# Altium PCB motherboard_2ch_arduino.PcbDoc
Units mil, origin at the board's own origin, x right, y up, seen from the top; angles counter-clockwise.
Board outline 6102.36 x 3937.01 mil, 2 copper layers (Top Layer, Bottom Layer); 50 components, 61 nets, 260 pads, 186 vias.
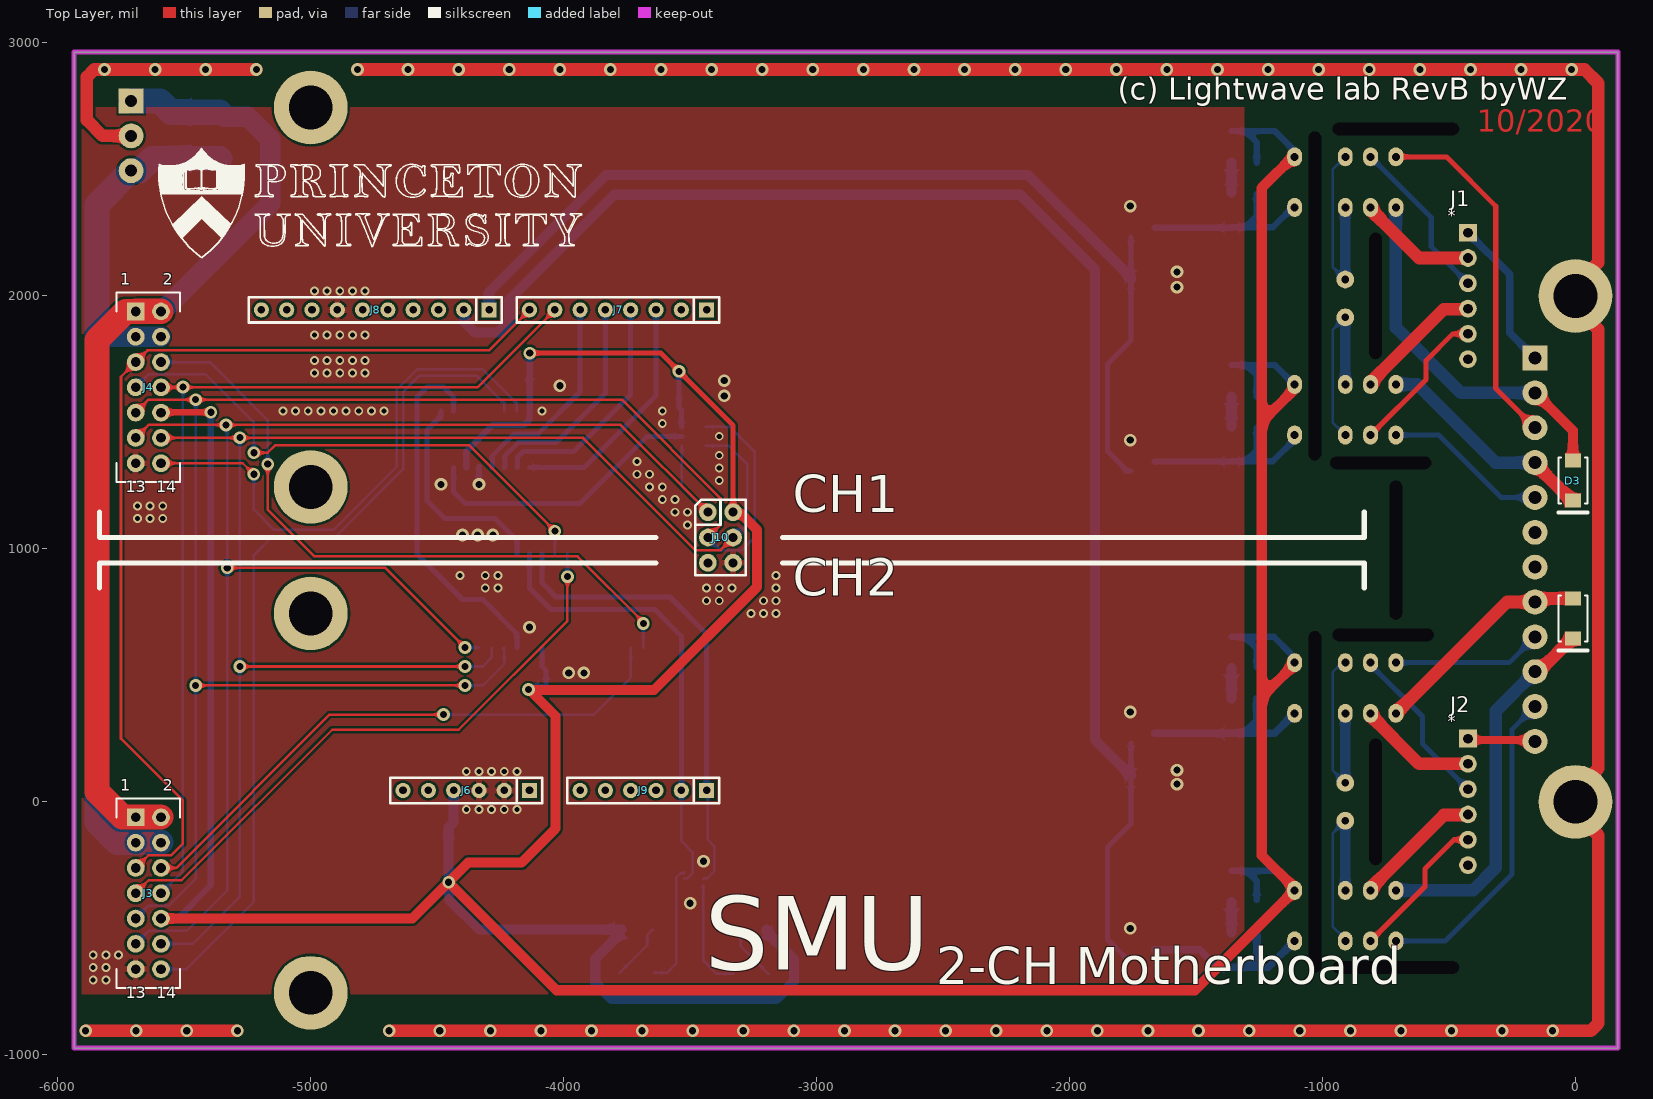
[diagram p0: Top Layer view]
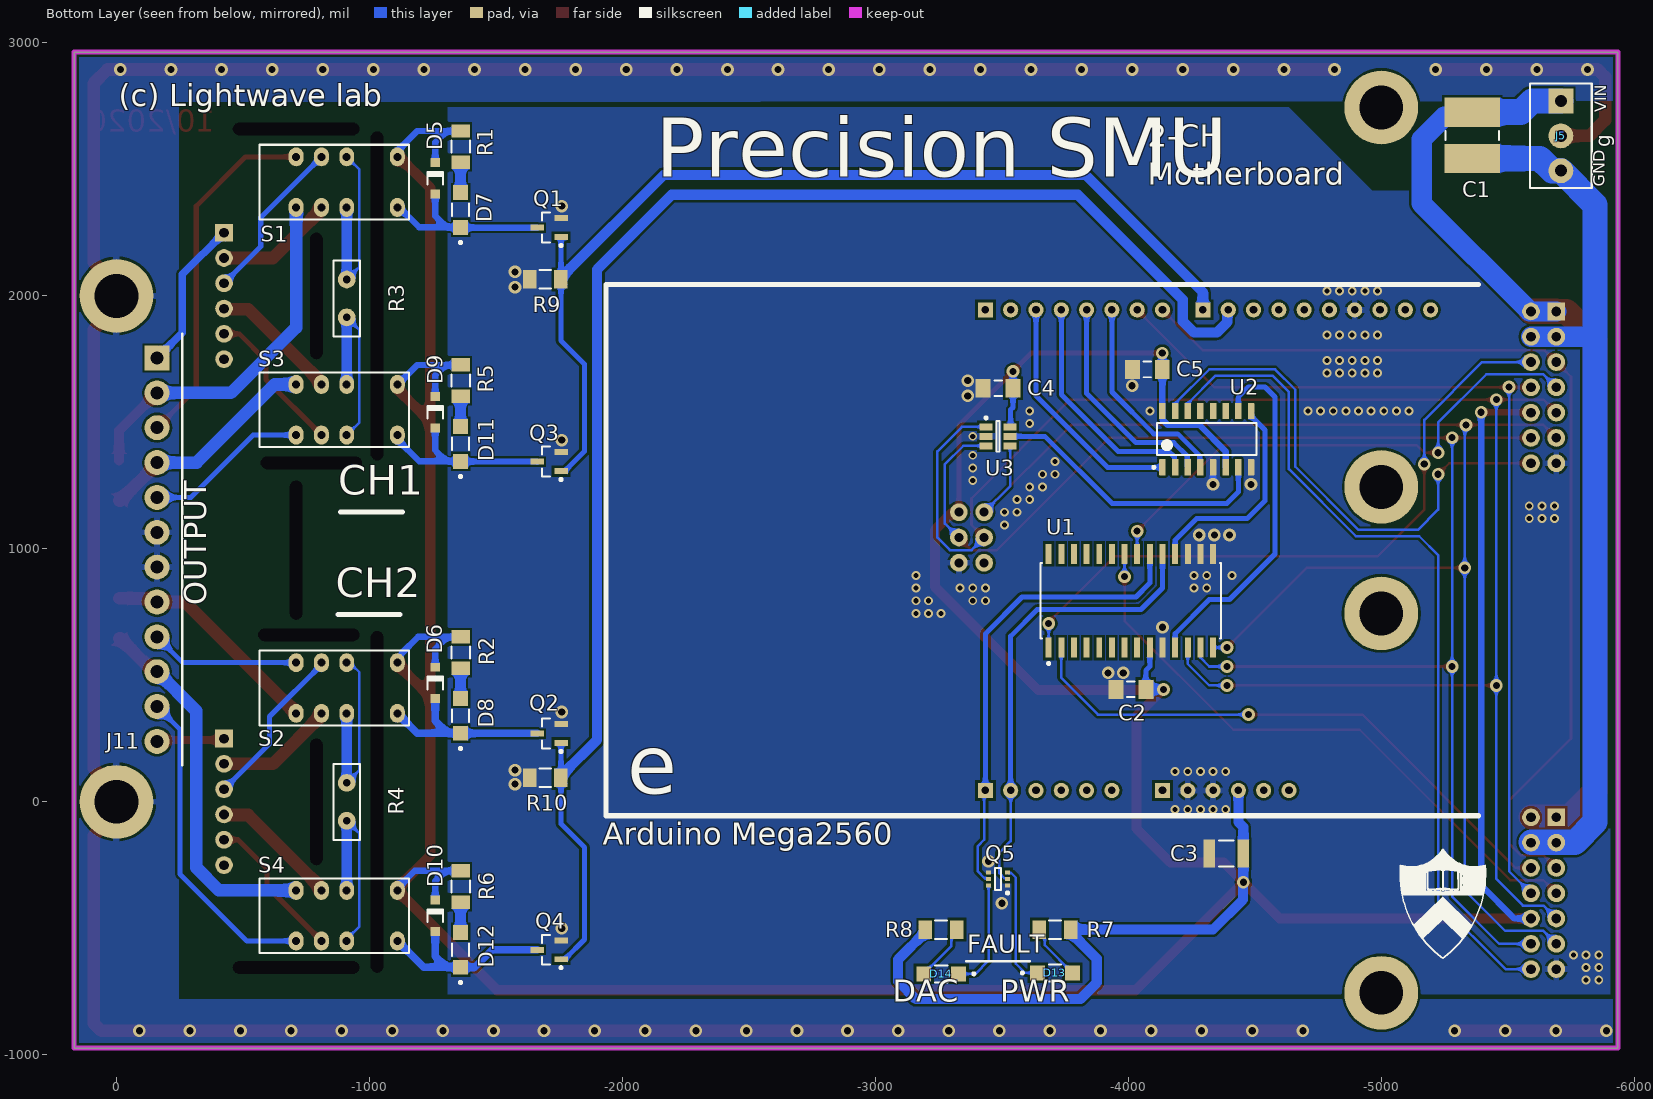
[diagram p1: Bottom Layer view, seen from below]

## Layer stack, top to bottom
Top Solder: solder mask 0.4, Solder Resist, Dk 3.5
Top Layer: signal copper 1.4
Dielectric 1: dielectric 12.6, FR-4, Dk 4.8
Bottom Layer: signal copper 1.4
Bottom Solder: solder mask 0.4, Solder Resist, Dk 3.5

## Board outline
-5935,-973.5 -5935,2963.5 167.36,2963.5 167.36,-973.5

## Design rules (kind name [scope] priority, off if disabled: settings)
BoardOutlineClearance [All] p1: gap=15 ignorepadtopadclearanceinfootprint=FALSE
Clearance [All] p1: gap=6 ignorepadtopadclearanceinfootprint=FALSE except(0: Arc-Hole Track-Hole SMDPad-Hole THPad-Hole Via-Hole Fill-Hole Poly-Hole Region-Hole Text-Hole; 10: Track-Poly SMDPad-Poly THPad-Poly THPad-Region Via-Poly Fill-Poly Poly-Poly)
ComponentClearance [All] p1: gap=1 collisioncheckmode=3 verticalgap=1 showdistances=FALSE
DiffPairsRouting [All] p1: maxlimit=393.7 minlimit=6 mostfreqgap=8 toplayer_minwidth=6 toplayer_maxwidth=15 toplayer_prefwidth=8 bottomlayer_minwidth=6 bottomlayer_maxwidth=15 bottomlayer_prefwidth=8 maxuncoupledlength=500
HoleSize [All] p1: absolutevalues=TRUE maxlimit=265 minlimit=13 maxpercent=80.000 minpercent=20.000
HoleToHoleClearance [All] p1: gap=10 allowstackedmicrovias=FALSE
MinimumAnnularRing [All] p1: minimumring=7
MinimumSolderMaskSliver [All] p1: minsoldermaskwidth=0
PlaneClearance [All] p1: clearance=10
PlaneConnect [All] p1: planeconnectstyle=Direct reliefexpansion=16 reliefentries=4 reliefconductorwidth=6 reliefairgap=6
PolygonConnect [All] p1: thpad.connectstyle=Relief thpad.reliefconductorwidth=25 thpad.reliefentries=4 thpad.polygonreliefangle="90 Angle" thpad.airgapwidth=10 smdpad.connectstyle=Direct smdpad.reliefconductorwidth=8 smdpad.reliefentries=4 smdpad.polygonreliefangle="90 Angle" smdpad.airgapwidth=6 via.connectstyle=Direct via.reliefconductorwidth=8 via.reliefentries=4 via.polygonreliefangle="90 Angle" via.airgapwidth=6
RoutingCorners [All] p1: cornerstyle=45-Degree minsetback=49.21 maxsetback=49.21
RoutingVias [All] p1: holewidth=15 width=30 viastyle="Through Hole" minholewidth=13 minwidth=27 maxholewidth=100 maxwidth=114
SilkToSilkClearance [All] p1: silktosilkclearance=0
SilkToSolderMaskClearance [IsPad] p1: minsilkscreentomaskgap=6 clearancetoexposedcopper=TRUE
SolderMaskExpansion [All] p1: expansion=2.95 istentingtop=FALSE
Width [All] p1: maxlimit=400 minlimit=6 preferedwidth=8
20 further rules are at their usual default settings.

## Components (designator, comment, footprint, x,y, rotation, side; value= is the part's Value field where it differs from the comment)
C1 "KRM55TR71H226MH01L" CAPC6050X50M -5360,2635 r90 bottom
C2 "C1206C104J3GACAUTO" FP-C1206C-EB-IPC_A -4010,445 r180 bottom value="0.10 μF"
C3 "1210YD107MAT2A" MURA-1210_H_2.7_M -4387,-205 r180 bottom
C4 "C1206C104J3GACAUTO" FP-C1206C-EB-IPC_A -3485,1635 r0 bottom value="0.10 μF"
C5 "C1206C104J3GACAUTO" FP-C1206C-EB-IPC_A -4075,1710 r180 bottom value="0.10 μF"
D3 "SMAJ33CA-TR" STM-SMA-2_V -10,1270 r270 top
D4 "SMAJ33CA-TR" STM-SMA-2_V -10,725 r270 top
D5 "1N4148W-7-F" DIOD-SOD123-2_V -1260,2465 r90 bottom
D6 "1N4148W-7-F" DIOD-SOD123-2_V -1260,470 r90 bottom
D7 "LTST-C150KGKT" FP-LTST-C150KGKT-MFG -1360,2340 r90 bottom
D8 "LTST-C150KGKT" FP-LTST-C150KGKT-MFG -1360,340 r90 bottom
D9 "1N4148W-7-F" DIOD-SOD123-2_V -1260,1540 r90 bottom
D10 "1N4148W-7-F" DIOD-SOD123-2_V -1260,-450 r90 bottom
D11 "LTST-C150KGKT" FP-LTST-C150KGKT-MFG -1360,1415 r90 bottom
D12 "LTST-C150KGKT" FP-LTST-C150KGKT-MFG -1360,-585 r90 bottom
D13 "LTST-C150KGKT" FP-LTST-C150KGKT-MFG -3710,-676 r180 bottom
D14 "LTST-C150KGKT" FP-LTST-C150KGKT-MFG -3260,-680 r0 bottom
J1 "5-146276-6" SMUIO -425,2250 r0 top locked
J2 "5-146276-6" SMUIO -425,250 r0 top locked
J3 "5-146252-7" DATAIO -5691.89,-61.42 r0 top locked
J4 "5-146252-7" DATAIO -5691.89,1938.58 r0 top locked
J5 "1984620" 1984620 -5710,2632.8 r270 bottom
J6 "POWER" "HEADER 6X1 8.5MM" -4135,45 r180 top
J7 "IOL" "HEADER 8X1 8.5MM" -3435,1945 r180 top
J8 "IOH" "HEADER 10X1 8.5MM" -4295,1945 r180 top
J9 "AD" "HEADER 6X1 8.5MM" -3435,45 r180 top
J10 "ICSP" ICSP -3430,1145 r0 top
J11 "SMU_OUTPUT" 1843897 -160,1754.57 r270 bottom
Q1 "2N7002" INF-PG-SOT23_M -1710,2270 r0 bottom
Q2 "2N7002" INF-PG-SOT23_M -1710,270 r0 bottom
Q3 "2N7002" INF-PG-SOT23_M -1710,1345 r0 bottom
Q4 "2N7002" INF-PG-SOT23_M -1710,-585 r0 bottom
Q5 "MBT3904DW1T1G" ONSC-SOT-363-6-419B-02_W_V -3485,-305 r0 bottom
R1 "RN73R2BTTD1001B25" FP-RC3216-IPC_A -1360,2590 r90 bottom
R2 "RC3216J102CS" FP-RC3216-IPC_A -1360,590 r90 bottom
R3 "Y1453500R000V9L" Y1453500R000V9L -910,1990 r90 bottom
R4 "Y1453500R000V9L" Y1453500R000V9L -910,0 r90 bottom
R5 "RC3216J102CS" FP-RC3216-IPC_A -1360,1665 r90 bottom
R6 "RC3216J102CS" FP-RC3216-IPC_A -1360,-335 r90 bottom
R7 "RC3216J102CS" FP-RC3216-IPC_A -3710,-505 r0 bottom
R8 "RC3216J102CS" FP-RC3216-IPC_A -3260,-505 r0 bottom
R9 "RN73H2BTTD1002B10" FP-RC3216-IPC_A -1695,2065 r180 bottom
R10 "RN73H2BTTD1002B10" FP-RC3216-IPC_A -1695,95 r180 bottom
S1 "G6S-2 DC5" EE2-5NU -860,2450 r0 bottom
S2 "G6S-2 DC5" EE2-5NU -860,450 r0 bottom
S3 "G6S-2 DC5" EE2-5NU -860,1550 r0 bottom
S4 "G6S-2 DC5" EE2-5NU -860,-450 r0 bottom
U1 "MCP23S17T-E/SO" FP-C04-052-MFG -4010,795 r90 bottom
U2 "CD74HC138M" D0016A_M -4310,1433.78 r90 bottom
U3 "25AA02E48T-I/OT" SOT-23-OT6_M -3485,1445 r180 bottom

## Footprints (in the part's own frame and the unit in brackets; to place one, negate y for a bottom-side part, rotate by r counter-clockwise, add the part's x,y. Pads: shape width x height; smd on the part's side, far side on the other; paste and mask are expansions set on the pad)
1843897 [mm]
  rect 2.5x2.5 hole 1.3: 1(0,0)
  round 2.5 hole 1.3: 2(3.5,0) 3(7,0) 4(10.5,0) 5(14,0) 6(17.5,0) 7(21,0) 8(24.5,0) 9(28,0) 10(31.5,0) 11(35,0) 12(38.5,0)
  silkscreen extent -2.45,2.54 40.9,2.54
1984620 [mm]
  rect 2.5x2.5 hole 1.2: 1(-3.5,0)
  round 2.5 hole 1.2: 2(0,0) 3(3.5,0)
  silkscreen extent -5.25,-3.1 5.25,3.1
CAPC6050X50M [mm] "Chip Capacitor, 2-Leads, Body 6.00x5.00mm, IPC Low Density"
  rect 2.95x5.6 smd: 1(-2.325,0) 2(2.325,0)
  silkscreen extent -0.45,-2.7 0.45,2.7, body extent -3.25,-2.75 3.25,2.75, height 5
D0016A_M [mm] "SOIC, 16-Leads, Body 10x4mm, Pitch 1.27mm, IPC Low Density"
  rrect15% 1.65x0.65 smd: 1(-2.825,4.445) 2(-2.825,3.175) 3(-2.825,1.905) 4(-2.825,0.635) 5(-2.825,-0.635) 6(-2.825,-1.905) 7(-2.825,-3.175) 8(-2.825,-4.445) 9(2.825,-4.445) 10(2.825,-3.175) 11(2.825,-1.905) 12(2.825,-0.635) 13(2.825,0.635) 14(2.825,1.905) 15(2.825,3.175) 16(2.825,4.445)
  silkscreen extent -2.95,-5 1.6,5.45, body extent -3,-4.95 3,4.95, height 1.59
DATAIO [mil]
  rect 70x70 hole 38: 1(0,0)
  round 70 hole 38: 2(100,0) 3(0,-100) 4(100,-100) 5(0,-200) 6(100,-200) 7(0,-300) 8(100,-300) 9(0,-400) 10(100,-400) 11(0,-500) 12(100,-500) 13(0,-600) 14(100,-600)
  silkscreen extent -75,-675 175,75
DIOD-SOD123-2_V [mm] "SOD123, 2-Leads, Body 2.7x1.55mm, Height 1.45mm"
  rect 0.9x0.95 smd: 1(-1.575,0) 2(1.575,0)
  silkscreen extent -0.64,-0.83 0.64,0.77, body extent -1.35,-0.77 1.35,0.77, height 1.45
EE2-5NU [mm]
  oval 1.5x1.9 hole 0.8: 1(-6.35,2.54) 3(-1.27,2.54) 4(1.27,2.54) 5(3.81,2.54) 8(3.81,-2.54) 9(1.27,-2.54) 10(-1.27,-2.54) 12(-6.35,-2.54)
  silkscreen extent -7.5,-3.75 7.5,3.75, body extent -7.5,-3.75 7.5,3.75, height 9.4
FP-C04-052-MFG [mm]
  rect 2x0.6 smd paste+0 mask+0: 1(-4.7,8.255) 2(-4.7,6.985) 3(-4.7,5.715) 4(-4.7,4.445) 5(-4.7,3.175) 6(-4.7,1.905) 7(-4.7,0.635) 8(-4.7,-0.635) 9(-4.7,-1.905) 10(-4.7,-3.175) 11(-4.7,-4.445) 12(-4.7,-5.715) 13(-4.7,-6.985) 14(-4.7,-8.255) 15(4.7,-8.255) 16(4.7,-6.985) 17(4.7,-5.715) 18(4.7,-4.445) 19(4.7,-3.175) 20(4.7,-1.905) 21(4.7,-0.635) 22(4.7,0.635) 23(4.7,1.905) 24(4.7,3.175) 25(4.7,4.445) 26(4.7,5.715) 27(4.7,6.985) 28(4.7,8.255)
  silkscreen extent -6.42,-9.05 3.8,9.05, body extent -3.8,-9.05 3.8,9.05, height 2.65
FP-C1206C-EB-IPC_A [mil]
  rect 59.24x75.05 smd paste+0 mask+0: 1(-59.09,0) 2(59.09,0)
  silkscreen extent -15,-31 15,31, body extent -63,-31 63,31, height 35
FP-LTST-C150KGKT-MFG [mm]
  rect 1.5x1.5 smd paste+0 mask+0: 1(-1.75,0) 2(1.75,0)
  silkscreen extent -3.4,-0.85 0.63,0.85, body extent -1.6,-0.8 1.6,0.8, height 1.1
FP-RC3216-IPC_A [mil]
  rect 53.34x73.16 smd paste+0 mask+0: 1(-62.03,0) 2(62.03,0)
  silkscreen extent -24,-37 24,37, body extent -63,-31 63,31, height 26
"HEADER 6X1 8.5MM" [mil] "Stackable 6 pin header"
  rect 60x60 hole 30: 1(0,0)
  round 60 hole 30: 2(100,0) 3(200,0) 4(300,0) 5(400,0) 6(500,0)
  silkscreen extent -50,-50 550,50, body extent -50,-50 550,50, height 335
"HEADER 8X1 8.5MM" [mil] "Stackable 8 pin header"
  rect 60x60 hole 30: 1(0,0)
  round 60 hole 30: 2(100,0) 3(200,0) 4(300,0) 5(400,0) 6(500,0) 7(600,0) 8(700,0)
  silkscreen extent -50,-50 750,50, body extent -50,-50 750,50, height 335
"HEADER 10X1 8.5MM" [mil] "Stackable 10 pin header"
  rect 60x60 hole 30: 1(0,0)
  round 60 hole 30: 2(100,0) 3(200,0) 4(300,0) 5(400,0) 6(500,0) 7(600,0) 8(700,0) 9(800,0) 10(900,0)
  silkscreen extent -50,-50 950,50, body extent -50,-50 950,50, height 335
ICSP [mil]
  round 70 hole 35.43: 1(0,0) 2(100,0) 3(0,-100) 4(100,-100) 5(0,-200) 6(100,-200)
  silkscreen extent -50,-250 150,50, body extent -50,-250 150,50, height 485
INF-PG-SOT23_M [mm] "SOT23, 3-Leads, Body 2.9x1.3mm, Pitch 0.95mm, IPC Low Density"
  rect 1.35x0.6 smd: 1(-1.2,0.95) 2(-1.2,-0.95) 3(1.2,0)
  silkscreen extent -1.32,-1.5 0.7,1.92, body extent -0.7,-1.5 0.7,1.5, height 1.1
MURA-1210_H_2.7_M [mm] "Chip Capacitor, 2-Leads, Body 3.5x2.7mm, IPC Low Density"
  rect 1.15x2.8 smd: 1(-1.725,0) 2(1.725,0)
  silkscreen extent -0.75,-1.3 0.75,1.3, body extent -1.75,-1.35 1.75,1.35, height 2.7
ONSC-SOT-363-6-419B-02_W_V [mm] "SOT23, 6-Leads, Body 2x1.25mm, Pitch 0.65mm"
  rect 0.5x0.4 smd: 1(-0.95,0.65) 2(-0.95,0) 3(-0.95,-0.65) 4(0.95,-0.65) 5(0.95,0) 6(0.95,0.65)
  silkscreen extent -1.07,-1.1 0.3,1.52, body extent -0.63,-1 0.63,1, height 1.1
SMUIO [mil]
  rect 70x70 hole 38: 1(0,0)
  round 70 hole 38: 2(0,-100) 3(0,-200) 4(0,-300) 5(0,-400) 6(0,-500)
SOT-23-OT6_M [mm] "SOT23, 6-Leads, Body 2.9x1.7mm, Pitch 0.95mm, Lead Span 2.8mm, IPC Low Density"
  rect 1.3x0.7 smd: 1(-1.2,0.95) 2(-1.2,0) 3(-1.2,-0.95) 4(1.2,-0.95) 5(1.2,0) 6(1.2,0.95)
  silkscreen extent -1.33,-1.55 0.15,1.97, body extent -0.9,-1.55 0.9,1.55, height 1.45
STM-SMA-2_V [mm] "Diode, 2-Leads, Body 4.6x2.9mm"
  rect 1.4x1.64 smd: 1(-2.015,0) 2(2.015,0)
  silkscreen extent -2.3,-1.45 3.21,1.45, body extent -2.3,-1.45 2.3,1.45, height 2.59
Y1453500R000V9L [mil]
  round 70 hole 30: 1(-75,0) 2(75,0)
  silkscreen extent -150,-52 150,52, body extent -150,-53 150,53, height 325

## Part data
C1: library part CAP22uF
C2 C4 C5: library part CMP-03020-020888-1, "CAP CER 0.1UF 25V C0G/NP0 1206", Capacitance="0.10 μF", Manufacturer=KEMET, Package=C1206C-EB, Temperature="-55°C to +150°C", Temperature Characteristic=C0G, Temperature Coefficient=15%, Temperature Range High=+150°C, Temperature Range Low=-55°C, Tolerance=0.05, Voltage Rating="25 V", Automotive=Yes, Automotive Grade="Grade 0", Category=Cap, ComponentLink2Description=Datasheet, ComponentLink2URL=https://content.kemet.com/datasheets/KEM_C1007_X8R_ULTRA_150C_SMD.pdf, Device Class L1="Passive Components", Device Class L2=Capacitors, Device Class L3="Ceramic Capacitors", Digikey Description="CAP CER 0.1UF 25V C0G/NP0 1206", Height=0.88mm, Ipc Land Pattern Name=CAPC320160X78, Lead Free=Yes, Manufacturer Part Number=C1206C104J3GACAUTO, Material=Ceramic, Mouser Description="Multilayer Ceramic Capacitor, AEC-Q200 MLCC Series, 0.1 - F, - 5%, C0G / NP0, 25 V", Octopart=https://octopart.com/c1206c104j3gacauto-kemet-22570084, RoHS=TRUE
C3: library part CMP-2000-06362-1, "Cap Ceramic, 47 uF, +/- 10%, -55 to 85 degC, 2-Pin SMD (1210), RoHS, Tape and Reel", Capacitance=47µF, Manufacturer=Murata, Operating Temperature=-55°C~85°C, Package / Case=1210(3225Metric), Package Description="2-Pin Surface Mount Device, Body 3.2 x 2.5 mm", Package Reference=1210, Ratings=-, Standard Package=1, Temperature Coefficient=X5R, Tolerance=±10%, Voltage - Rated=16V, Applications=GeneralPurpose, Catalog Drawings=GRMSeries_1210_2.5, Category=Capacitors, Datasheet URL=http://psearch.en.murata.com/capacitor/product/GRM32ER61C476KE15%23.pdf, Datasheet Version=04/2016, Family=CeramicCapacitors, Features=-, Height - Seated (Max)=-, Lead Spacing=-, Lead Style=-, Manufacturer URL=http://www.murata.com/, Mounting Technology=SurfaceMount, Mounting Type=SurfaceMount,MLCC, Online Catalog=GRMSeries, Other Names=490-6539-6, Packaging=Digi-Reel®, Product Training Modules=High-CapMultilayerCeramicCapacitors, Series=GRM, Size / Dimension="0.126\"Lx0.098\"W(3.20mmx2.50mm)", Thickness (Max)="0.106\"(2.70mm)", Voltage Rating DC=16V
D3 D4: library part CMP-2000-05373-2, "Transil(TM) Diode, 33 A, 36.7 V, -55 to 150 degC, 2-Pin SMA, RoHS, Tape and Reel", Breakdown Voltage Min=36.7V, Clamping Voltage Vc Max=69.7V, Diode Case Style=DO-214AC, Manufacturer=STMicroelectronics, Package Description="2-Pin Surface Mount Device, Body 4.275 x 2.575 mm", Package Reference=SMA, Peak Pulse Current Ippm="7.5 /  / A", Peak Pulse Power Dissipation=400W, Power Dissipation Pd="400 /  / W", Reverse Stand-Off Voltage Vrwm=33V, Datasheet URL=http://www.st.com/st-web-ui/static/active/en/resource/technical/document/datasheet/CD00001333.pdf, Datasheet Version="Rev. 12, 07/2010", Manufacturer URL=http://www.st.com/, No. of Pins=2Pins, Package URL=http://www.st.com/st-web-ui/static/active/en/resource/technical/document/datasheet/CD00283518.pdf, Packaging=CutTape, Product Range=SMAJSeries, SVHC=NoSVHC(17-Dec-2015), TVS Polarity=Bidirectional
D5 D6 D9 D10: library part CMP-2000-04932-2, "Fast Switching Diode, 100 V, 0.15 A, -65 to 150 degC, 2-Pin?SOD123, RoHS, Tape and Reel", If - Forward Current=0.15A, Ir - Reverse Current=1uA, Manufacturer=DiodesIncorporated, Max Surge Current=2A, Maximum Operating Temperature=+150C, Minimum Operating Temperature=-65C, Operating Temperature Range=-65Cto+150C, Package / Case=SOD-123, Package Reference=SOD123-2, Peak Reverse Voltage=100V, Vf - Forward Voltage=1.25V, Brand=DiodesIncorporated, Configuration=Single, Datasheet URL=http://www.farnell.com/datasheets/1915529.pdf, Datasheet Version="Rev. 24-2, 10/2013", Factory Pack Quantity=3000, Height=1.25mm, Length=2.85mm, Manufacturer URL=http://www.diodes.com/, Mounting Style=SMD/SMT, Package URL=http://www.diodes.com/datasheets/ds18004.pdf, Packaging=Reel, Product=SwitchingDiodes, Product Category=Diodes-GeneralPurpose,Power,Switching, Recovery Time=4ns, RoHS=True, Series=1N4148, Type=SwitchingDiode, Unit Weight=0.000353oz, Width=1.7mm
D7 D8 D11 D12 D13 D14: library part CMP-22017-000010-1, "LED GREEN CLEAR 1206 SMD", Case Code (Imperial)=1206, Case Code (Metric)=3216, Color=Green, Forward Current=30mA, Forward Voltage=2V, Lens Color=Colorless, Max Operating Temperature=85°C, Min Operating Temperature=-55°C, Package Quantity=1, Power Dissipation=75mW, Reverse Voltage=5V, Test Current=20mA, Case/Package=1206, Depth=1.6mm, Dominant Wavelength=571nm, Height=1.1mm, Illumination Color=Green, Lead Free="Lead Free", Length=3.2mm, Lens Style=Diffused, Lens Transparency=Clear, Luminous Intensity=71mcd, Mount="Surface Mount", Number of Elements=1, Number of LEDs=1, Number of Pins=2, Packaging="Tape and Reel", Power Rating=75mW, Radiation Hardening=No, Viewing Angle=130°, Wavelength=574nm, Width=1.6mm
J1 J2: library part SMUIO_RevB
J3 J4: library part DATAIO
J5: library part POWERJACK
J6: Supplier Part Number 1=2699075, Supplier 1=Arrow, Supplier 2=Arrow, Supplier 3=Newark, Supplier 4=Digi-Key, Supplier Part Number 2=2699089, Supplier Part Number 3=11P8269, Supplier Part Number 4=SAM1198-06-ND
J7: Supplier Part Number 1=2698925, Supplier 1=Arrow, Supplier 2=Arrow, Supplier 3=Digi-Key, Supplier Part Number 2=2698940, Supplier Part Number 3=SAM1198-08-ND
J8: Supplier Part Number 1=2698789, Supplier 1=Arrow, Supplier 2=Arrow, Supplier 3=Digi-Key, Supplier Part Number 2=2698803S4475693N1004, Supplier Part Number 3=SAM1198-10-ND
J9: Supplier Part Number 1=52553843, Supplier 1=Arrow, Supplier 2=Arrow, Supplier 3=Digi-Key, Supplier 4=Newark, Supplier Part Number 2=2699089, Supplier Part Number 3=SAM1198-06-ND, Supplier Part Number 4=11P8269
J10: Supplier Part Number 1=SAM1185-03-ND, Supplier 1=Digi-Key, Supplier 2=Arrow, Supplier 3=Arrow, Supplier Part Number 2=2699340, Supplier Part Number 3=46091550
Q1 Q2 Q3 Q4: library part CMP-1149-00026-1, "N-Channel OptiMOS Small-Signal-Transistor, 60 V VDS, 0.3 A ID, -55 to 150 degC, PG-SOT23, Reel, Green", Manufacturer=Infineon, ComponentLink1Description="Manufacturer URL", ComponentLink1URL=http://www.infineon.com/, ComponentLink2Description=Datasheet, ComponentLink2URL=http://www.infineon.com/dgdl/2N7002_Rev2.4.pdf?folderId=db3a3043156fd573011622e10b5c1f67&fileId=db3a304319bc939a0119c2a9461e79e6, ComponentLink3Description="Package Specification", ComponentLink3URL=http://www.infineon.com/dgdl/SOT23-Package_Overview.pdf?folderId=db3a30431936bc4b0119532290053c66&fileId=db3a30431936bc4b0119533468123c85, DatasheetVersion="Rev. 2.4", Green=TRUE, Halogen-free=TRUE, ID (max)="0.3Â A", IDpuls (max)="1.2Â A", Mounting Technology="Surface Mount", PackageDescription="3-Pin Small Outline Transistor Package, 2.9 x 1.3 mm Body, 0.95 mm Pitch", PackageReference=PG-SOT23, PackageVersion=Apr-08, Packing=Reel, PartNumber=2N7002, Ptot (max)="0.5Â W", QG="0.4Â nC", RDS (on) (max)="3,000 mOhm", RDS (on) (max) (@4.5V)="4,000 mOhm", RthJA (max)="250 K/W", VDS (max)="60 V", VGS(th) (max)="2.5Â V", VGS(th) (min)="1.5Â V"
Q5: library part CMP-1048-00877-1, "Dual General Purpose Transistors, 6-Pin SOT-363, Pb-Free, Tape and Reel", Manufacturer="On Semiconductor", ComponentLink1Description="Manufacturer URL", ComponentLink1URL=http://www.onsemi.com/, ComponentLink2Description=Datasheet, ComponentLink2URL=http://www.onsemi.com/pub_link/Collateral/MBT3904DW1T1-D.PDF, ComponentLink3Description="Package Specification", ComponentLink3URL=http://www.onsemi.com/pub_link/Collateral/NTJD4001N-D.PDF, DatasheetVersion="Rev. 9", fT Min (MHz)=300, IC Continuous (A)=0.2, Mounting Technology="Surface Mount", PackageDescription="6-Pin Small Outline Transistor, Body 2 x 1.25 mm, Pitch 0.65 mm", PackageReference=SOT-363-6-419B-02_W, PackageVersion="Rev. W, 01/2006", Packing="Tape and Reel", PartNumber=MBT3904DW1T1G, Polarity="Dual NPN", RoHS=TRUE
R1 R2 R5 R6 R7 R8: library part CMP-13261-001932-1, "Res Thick Film 1206 1kΩ 5% 0.25W ±100ppm/°C Molded SMD T/R", Case Code (Imperial)=1206, Case Code (Metric)=3216, Max Operating Temperature=155°C, Max Power Dissipation=250mW, Min Operating Temperature=-55°C, Resistance=1kR, Temperature Coefficient=100ppm/°C, Tolerance=5%, Voltage Rating (DC)=200V, Case/Package=1206, Composition="Thick Film", Contact Plating=Tin, Depth=1.6mm, Features="Moisture Resistant", Height=0.026inch, Lead Free="Lead Free", Length=0.126inch, Military Standard=Not, Number of Terminations=2, Packaging="Tape and Reel", Power Rating=250mW, Radiation Hardening=No, Width=0.063inch
R9 R10: library part CMP-13261-000768-1, "RES SMD 10K OHM 1% 1/4W 1206", Case Code (Imperial)=1206, Case Code (Metric)=3216, Max Operating Temperature=155°C, Max Power Dissipation=250mW, Min Operating Temperature=-55°C, Resistance=10kR, Temperature Coefficient=100ppm/°C, Tolerance=1%, Voltage Rating (DC)=200V, Case/Package=1206, Composition="Thick Film", Contact Plating=Tin, Depth=1.6mm, Features="Moisture Resistant", Height=0.026inch, Lead Free="Lead Free", Length=0.126inch, Military Standard=Not, Number of Terminations=2, Packaging="Tape and Reel", Radiation Hardening=No, Width=0.063inch
S1 S2 S3 S4: library part EE2-5NU
U1: library part CMP-06293-000003-1, "IC I/O EXPANDER SPI 16B 28SOIC", Case/Package=SOIC, Frequency=10MHz, Max Operating Temperature=125°C, Max Supply Voltage=5.5V, Min Operating Temperature=-40°C, Min Supply Voltage=4.5V, Nominal Supply Current=1mA, Package Quantity=1600, Power Dissipation=700mW, Interface=SPI, Lead Free="Lead Free", Max Frequency=10MHz, Mount="Surface Mount", Number of Bits=16, Number Of Channels=1, Number of I/Os=16, Number of Pins=28, Packaging="Tape and Reel", REACH SVHC="No SVHC"
U2: library part CMP-1633-00149-2, "High Speed CMOS Logic 3-to-8 Line Decoder Demultiplexer Inverting and Non-Inverting, D0016A, TUBE", F @ Nom Voltage(Max)(Mhz)=28, Generic Part Number=CD74HC138, ICC @ Nom Voltage(Max)(mA)=0.08, Manufacturer="Texas Instruments", Operating Temperature Range(C)="-55 to 125", Rating=Catalog, tpd @ Nom Voltage(Max)(ns)=30, Voltage(Nom)(V)=3.3,5, Bits(#)=8, Channels(#)=1, Code_JEDEC="MS-012 variation AC", Configuration=3：8, DatasheetVersion=SCHS147I, Function=Decoder/Demultiplexer, Input Type=LVTTL/CMOS, Output Drive (IOL/IOH)(Max)(mA)=5.2/-5.2, Output Type=CMOS, PackageReference=D0016A, Schmitt Trigger=No, Technology Family=HC, Type=Standard, VCC(Max)(V)=6, VCC(Min)(V)=2
U3: library part CMP-0165-00270-1, "2K SPI Bus Serial EEPROM with EUI-48 Node Identity, 6-Pin SOT-23, Industrial Temperature, Tape and Reel", Code_IPC=SOT26A-6, DatasheetVersion="revA, Dec-2008", PackageDescription="6-Lead Plastic Small Outline Transistor (OT) [SOT-23]", PackageReference=SOT-23-OT6, PackageVersion="revBB, Aug-2009"

## Free pads (board coordinates)
  round 291.34 hole 173.23 unplated: ""(-5000,-755) ""(-5000,745) ""(-5000,1245) ""(-5000,2745)
  round 0 hole 50 slot 1350 at 90 deg unplated: ""(-1030,0)
  round 0 hole 50 slot 1300 at 90 deg unplated: ""(-1030,2000)
  round 0 hole 50 slot 500 at 90 deg unplated: ""(-790,0) ""(-790,2000)
  round 0 hole 50 slot 400 at 0 deg unplated: ""(-770,1340) ""(-760,660)
  round 0 hole 50 slot 500 at 0 deg unplated: ""(-710,-655) ""(-710,2660)
  round 0 hole 50 slot 550 at 90 deg unplated: ""(-710,995)
  round 291.34 hole 173.23: ""(0,0) ""(0,2000)

## Via types
v1: diameter 35, hole 20, Top Layer to Bottom Layer, tented both sides, 86 vias
v2: diameter 50, hole 28, Top Layer to Bottom Layer, 57 vias
v3: diameter 50, hole 28, Top Layer to Bottom Layer, tented both sides, 43 vias

## Nets (pads, with @x,y where several pads share a name; then routed paths per layer and width w, separated by ;. In a path a pad name is that pad's centre, name@x,y a point inside that pad or via, vN(x,y) a via of type N, cw(c..) or ccw(c..) an arc to the next point about the centre after c; other vN are vias at no path point)
+5: C2.2 C3.2 C4.1 C5.2 D5.2 D6.2 D9.2 D10.2 J3.10 J4.10 J6.4 J10.2 R1.2 R2.2 R5.2 R6.2 R7.1 R8.2 S1.12 S2.12 S3.12 S4.12 U1.9 U2.6 U2.16 U3.6 | length 19704.3
  Top Layer w20: J4.10 J4.10@-5590.47,1540 ; v3(-4134,1774) -3616,1774 v3(-3544,1702) -3330,1488 J10.2
  Top Layer w25: J4.10@-5590.47,1540 v3(-5395,1540)
  Top Layer w40: J3.10 -4598.42,-461.42 -4456,-319 -4455,-319 v3(-4455,-318) ; v3(-4139,444) -4137.09,442.09 v3@-4135.09,442.09 ; J10.2 -3324.26,1139.26 -3299.26,1139.26 -3235,1075 -3235,850 -3642.91,442.09 v3@-4135.09,442.09 ; S2.12 -1110,545 -1240,415 ; S3.12@-1110,1640 -1110,1632.13 -1240,1502.13 ; S1.12@-1110,2557.13 -1240,2427.13 -1240,1502.13 ; v3(-4455,-318) -4028,-745 -1505,-745 -1121.52,-361.52 -1118.8,-361.52 -1110,-352.72 S4.12 -1110,-342.13 -1240,-212.13 -1240,415 ; v3(-4455,-318) -4377,-240 -4166,-240 -4032,-106 -4032,339 v3@-4135.09,442.09 ; -1240,415 -1240,1502.13
  Bottom Layer w20: U1.9 -4085,535 -4069,519 -4069,445.09 C2.2 ; v3(-3544,1702) -3544,1635.09 C4.1 -3544.09,1559.09 -3535,1550 -3535,1486.18 -3532.24,1483.43 U3.6
  Bottom Layer w25: J3.10 -5526.42,-461.42 -5395,-330 v3(-5395,1540) ; U2.6 -4385,1385 -4280,1490 -4155,1490 -4135,1510 U2.16 -4134.7,1545.3 -4134.7,1773.3 v3(-4134,1774) ; R6.2 -1300,-272.97 ; R2.2 -1307.03,652.03 ; R5.2 -1300,1727.03 ; R1.2 -1305,2652.03 ; D10.2 -1260,-312.97 -1300,-272.97 ; D6.2 -1260,605 -1307.03,652.03 ; D9.2 -1260,1687.03 -1300,1727.03 ; D5.2 -1260,2607.03 -1305,2652.03 ; S4.12 -1110,-342.13 -1179.16,-272.97 -1300,-272.97 ; S2.12@-1110,570 -1112.91,570 -1126.33,583.42 -1126.33,586.33 -1192.03,652.03 -1307.03,652.03 ; S3.12@-1110,1640 -1110,1647.87 -1189.16,1727.03 -1300,1727.03 ; S1.12@-1110,2565 -1110,2572.87 -1189.16,2652.03 -1305,2652.03
  Bottom Layer w40: v3(-4455,-318) -4453.09,-319.91 -4453.09,-386.91 -4335,-505 R7.1 -3778.7,-511.67 -3778.7,-523.7 -3875,-620 -3875,-715 -3810,-780 -3160,-780 -3090,-710 -3090,-622.87 -3197.97,-514.91 R8.2 ; v3@-4455,-316.55 -4455,-205.09 C3.2 ; C3.2@-4455,-202.91 -4455,-100 -4435,-80 J6.4 ; v3(-4139,444) -4139,445 C2.2
BS: J7.6 U2.4 | length 823.1
  Bottom Layer w20: U2.4 -4282.2,1325.35 -4282.2,1367.8 -4195,1455 -4100,1455 -3935,1620 J7.6
CS0: J7.3 U2.1 | length 957
  Bottom Layer w20: U2.1 -3917.44,1322.56 -3635,1605 J7.3
CS1: J7.4 U2.2 | length 926
  Bottom Layer w20: U2.2 -4182.2,1325.35 -4182.2,1362.8 -4160,1385 -3960,1385 -3735,1610 J7.4
CS2: J7.5 U2.3 | length 876
  Bottom Layer w20: U2.3 -4232.2,1325.35 -4232.2,1367.8 -4180,1420 -4030,1420 -3835,1615 J7.5
DADCS: J3.8 J4.8 J7.7 | length 3721.2
  Top Layer w10: J4.8 -4341.42,1638.58 J7.7
  Bottom Layer w10: J3.8 -5505,-274.53 v3(-5505,1640)
DCLK: J3.9 J4.9 J10.3 U1.12 U3.1 | length 6991
  Top Layer w10: J4.9 -5640.47,1590 v3(-5455,1590) -3770,1590 -3380,1200 -3380,1095 J10.3 ; v3(-5455,460) v3(-4390,460)
  Bottom Layer w10: J3.9 -5640.47,-410 -5560,-410 -5455,-305 v3(-5455,460) v3(-5455,1590) ; v3(-4390,460) -4320,460 -4235,545 -4235,599.96 -4240,604.96 U1.12 ; U3.1 -3342.4,1482.4 -3245,1385 -3245,1045 -3295,995 -3380,995 J10.3
EARTH: J5.2 J11.6 J11.7 pad.@0,0 pad.@0,2000 | length 15271.2
  Top Layer w20: v2(-5215.16,2895) v2@-5207.04,2895 ; v2@-4823.28,2895 v2(-4815.16,2895)
  Top Layer w50: v2(-5890,-905) v2(-5690,-905) v2(-5490,-905) v2(-5290,-905) ; J5.2 -5822.8,2632.8 -5885,2695 -5885,2865.71 -5855.71,2895 v2(-5815.16,2895) v2(-5615.16,2895) v2(-5415.16,2895) v2(-5215.16,2895) ; v2(-4815.16,2895) v2(-4615.16,2895) v2(-4415.16,2895) v2(-4215.16,2895) v2(-4015.16,2895) v2(-3815.16,2895) v2(-3615.16,2895) v2(-3415.16,2895) v2(-3215.16,2895) v2(-3015.16,2895) v2(-2815.16,2895) v2(-2615.16,2895) v2(-2415.16,2895) v2(-2215.16,2895) v2(-2015.16,2895) v2(-1815.16,2895) v2(-1615.16,2895) v2(-1415.16,2895) v2(-1215.16,2895) v2(-1015.16,2895) v2(-815.16,2895) v2(-615.16,2895) v2(-415.16,2895) v2(-215.16,2895) v2(-15.16,2895) 35.71,2895 90,2840.71 90,2132.24 0,2042.24 0,1957.76 90,1867.76 90,132.24 0,42.24 0,-42.24 90,-132.24 90,-875.71 60.71,-905 v2(-90,-905) v2(-290,-905) v2(-490,-905) v2(-690,-905) v2(-890,-905) v2(-1090,-905) v2(-1290,-905) v2(-1490,-905) v2(-1690,-905) v2(-1890,-905) v2(-2090,-905) v2(-2290,-905) v2(-2490,-905) v2(-2690,-905) v2(-2890,-905) v2(-3090,-905) v2(-3290,-905) v2(-3490,-905) v2(-3690,-905) v2(-3890,-905) v2(-4090,-905) v2(-4290,-905) v2(-4490,-905) v2(-4690,-905) ; J11.7 J11.7@-151.02,936.77 ; J11.6 J11.6@-157.54,1063.13
FAULT1: J4.7 U1.21 | length 2120.1
  Top Layer w10: v3(-5225,1380) -5170,1380 -5140,1410 -4375,1410 v3(-4035,1070)
  Bottom Layer w10: J4.7 -5640.47,1690 -5415,1690 -5225,1500 v3(-5225,1380) ; U1.21 v3(-4035,1070)
FAULT2: J3.7 U1.22 | length 2423.9
  Top Layer w10: J3.7 -5681.42,-361.42 -5681.42,-350.94 -5640.47,-310 -5510,-310 -4915,285 -4415,285 -3985,715 v3(-3985,890)
  Bottom Layer w10: v3(-3985,890) U1.22
FAULTINT: J9.1 Q5.5 U1.20 | length 1855.3
  Bottom Layer w10: Q5.5 -3444.72,-302.13 -3432.13,-302.13 -3405,-275 -3405,-175 -3430,-150 J9.1@-3430,40
  Bottom Layer w20: U1.20 -4085,865 -4030,810 -3580,810 -3435,665 J9.1 J9.1@-3430,40
GND: C2.1 C3.1 C4.2 C5.1 J3.13 J4.13 J6.2 J6.3 J8.7 J10.6 Q1.2 Q2.2 Q3.2 Q4.2 Q5.1 Q5.4 R9.1 R10.1 U1.10 U1.15 U1.16 U1.17 U2.5 U2.8 U3.2 | length 67.6
  Bottom Layer w25: v3(-4335,1255) U2.5
  other v1: -5860,-705 -5810,-705 -5860,-655 -5810,-655 -5860,-605 -5810,-605 -5760,-605 -4385,-30 -4335,-30 -4285,-30 -4235,-30 -4185,-30 -4385,120 -4335,120 -4285,120 -4235,120 -4185,120 -3260,745 -3210,745 -3160,745 -3435,795 -3385,795 -3210,795 -3160,795 -4310,845 -4260,845 -3435,845 -3385,845 -3335,845 -3160,845 -4410,895 -4310,895 -4260,895 -3160,895 -3510,1095 -5685,1120 -5635,1120 -5585,1120 -3560,1145 -3510,1145 -5685,1170 -5635,1170 -5585,1170 -3610,1195 -3560,1195 -3660,1245 -3610,1245 -3385,1270 -3710,1295 -3660,1295 -3385,1320 -3710,1345 -3385,1370 -3385,1445 -3610,1495 -5110,1545 -5060,1545 -5010,1545 -4960,1545 -4910,1545 -4860,1545 -4810,1545 -4760,1545 -4710,1545 -4085,1545 -3610,1545 -4985,1695 -4935,1695 -4885,1695 -4835,1695 -4785,1695 -4985,1745 -4935,1745 -4885,1745 -4835,1745 -4785,1745 -4985,1845 -4935,1845 -4885,1845 -4835,1845 -4785,1845 -4985,2020 -4935,2020 -4885,2020 -4835,2020 -4785,2020
  other v3: -1760,-500 -3500,-401 -3447,-235 -1575,70 -1575,125 -1760,355 -3980,510 -3920,510 -4135,690 -4400,1055 -4340,1055 -4280,1055 -4485,1255 -1760,1430 -3365,1605 -4015,1645 -3365,1665 -1575,2035 -1575,2095 -1760,2355
Guard_CH1: J1.1 J11.1 | length 605.2
  Bottom Layer w30: J1.1 -260,2085 -260,1854.57 J11.1
Guard_CH2: J2.1 J11.12 | length 269.6
  Top Layer w30: J2.1 -419.41,244.41 -165.59,244.41 J11.12
Hi_CH1: D3.1 J11.2 S1.5 | length 1464.8
  Top Layer w40: J11.2@-156.77,1616.77 J11.2 -10,1466.77 D3.1
  Bottom Layer w50: S1.5 -710,1875 -451.77,1616.77 J11.2
Hi_CH2: D4.1 J11.8 S2.5 | length 889.8
  Top Layer w50: S2.5 -710,352.72 -701.2,361.52 -698.48,361.52 -270,790 J11.8 -146.9,790 -132.57,804.33 D4.1
LDAC: J3.5 J4.5 J7.8 | length 3899.3
  Top Layer w10: J3.5 -5642.27,-211.8 -5551.8,-211.8 -5505,-165 -5505,5 -5750,250 -5750,1680.47 -5693.58,1736.89 -5691.89,1736.89 J4.5 -5645.47,1785 -4295,1785 J7.8
Lo_CH1: D3.2 J11.4 S3.8 | length 893.3
  Top Layer w50: J11.4 -160,1335.94 -14.72,1190.67 D3.2
  Bottom Layer w50: S3.8 -625,1650 -316.18,1341.18 J11.4
Lo_CH2: D4.2 J11.10 S4.8 | length 1475.3
  Top Layer w50: J11.10 -150.73,523.68 -136.72,523.68 -14.72,645.67 D4.2
  Bottom Layer w50: S4.8 -405,-350 -315,-260 -315,359.41 J11.10
MemCS: U2.7 U3.5 | length 1128.7
  Bottom Layer w20: U2.7 -4435,1225 -4390,1180 -3935,1180 -3670,1445 U3.5
MISO: J3.11 J4.11 J10.1 U1.14 U3.4 | length 6173.3
  Top Layer w10: J4.11 -5681.42,1438.58 -5681.42,1449.06 -5640.47,1490 v3(-5335,1490) -3775,1490 J10.1 ; v3(-5330,925) -4705,925 v3(-4390,610)
  Bottom Layer w10: J4.11@-5701.42,1429.06 -5701.42,1438.58 J4.11 ; J3.11 -5640.47,-510 -5490,-510 -5330,-350 v3(-5330,925) -5330,1485 v3(-5335,1490) ; v3(-4390,610) U1.14 U1.14 ; U3.4 -3532.24,1247.24 J10.1
MONCS: U1.11 U2.10 | length 1433.7
  Bottom Layer w20: U2.10 -4435,1600 -4475,1640 -4540,1640 -4580,1600 -4580,980 -4400,800 -4320,800 -4185,665 U1.11
MONRST: U1.18 U2.9 | length 851.9
  Bottom Layer w20: U2.9 -4485,1525.32 -4540,1470.32 -4540,1190 -4470,1120 -4270,1120 -4185,1035 U1.18
MOSI: J3.12 J4.12 J10.4 U1.13 U3.3 | length 6225.5
  Top Layer w10: J4.12 -3923.58,1438.58 -3480,995 -3380,995 J10.4 ; v3(-5280,535) v3(-4390,535)
  Bottom Layer w10: J3.12 -5466.42,-561.42 -5280,-375 v3(-5280,535) v3(-5280,1440) ; v3(-4390,535) -4320,535 -4285,570 U1.13 ; U3.3 -3347.6,1407.6 -3275,1335 -3275,1100 J10.4
NetD5_1: D5.1 D7.1 Q1.3 S1.1 | length 747.2
  Bottom Layer w25: Q1.3 -1361.1,2270 D7.1 -1305,2271.1 ; D5.1 -1260,2316.1 -1305,2271.1 ; S1.1@-1110,2365 -1110,2357.13 -1196.02,2271.1 -1305,2271.1
NetD6_1: D6.1 D8.1 Q2.3 S2.1 | length 743.5
  Bottom Layer w20: Q2.3 Q2.3@-1662.2,270.55 ; D8.1@-1360.55,270.55 D8.1
  Bottom Layer w30: Q2.3@-1662.2,270.55 D8.1@-1360.55,270.55 ; D8.1 -1310,271.1 ; D6.1 -1260,321.1 -1310,271.1 ; S2.1 -1132.39,327.6 -1188.9,271.1 -1310,271.1
NetD7_2: D7.2 R1.1 | length 119.1
  Bottom Layer w40: D7.2 R1.1
NetD8_2: D8.2 R2.1 | length 119.1
  Bottom Layer w40: D8.2 R2.1
NetD9_1: D9.1 D11.1 Q3.3 S3.1 | length 746.7
  Bottom Layer w25: Q3.3 -1662.2,1345.55 -1360.55,1345.55 D11.1 -1303.9,1346.1 ; D9.1 -1260,1390 -1303.9,1346.1 ; S3.1@-1110,1440 -1110,1432.2 -1196.1,1346.1 -1303.9,1346.1
NetD10_1: D10.1 D12.1 Q4.3 S4.1 | length 784.4
  Bottom Layer w30: Q4.3 -1485,-585 -1416.1,-653.9 D12.1 -1303.9,-653.9 ; D10.1 -1260,-610 -1303.9,-653.9 ; S4.1@-1123.43,-563.43 -1213.9,-653.9 -1303.9,-653.9 ; S4.1@-1123.42,-563.43 S4.1
NetD11_2: D11.2 R5.1 | length 119.1
  Bottom Layer w40: D11.2 R5.1
NetD12_2: D12.2 R6.1 | length 119.1
  Bottom Layer w40: D12.2 R6.1
NetD13_1: D13.1 Q5.3 | length 482.1
  Bottom Layer w10: D13.1 -3591,-676 -3555,-640 -3555,-300 -3537.28,-282.28 -3525.28,-282.28 Q5.3
NetD13_2: D13.2 R7.2 | length 225.2
  Bottom Layer w10: D13.2 -3669.64,-566.74 -3669.64,-526.67 R7.2
NetD14_1: D14.1 Q5.6 | length 440.4
  Bottom Layer w10: Q5.6 -3450,-332.99 -3448.07,-332.99 -3447.6,-333.46 -3447.6,-627.4 -3395,-680 D14.1
NetD14_2: D14.2 R8.1 | length 230.3
  Bottom Layer w10: R8.1 -3300.36,-526.67 -3300.36,-569.64 -3215.63,-654.37 -3215.63,-655.47 D14.2 D14.2@-3190,-680
NetJ1_2: J1.2 S1.4 | length 480.3
  Top Layer w50: S1.4 -810,2342.13 -617.87,2150 J1.2
  Bottom Layer w40: S1.4@-810,2342.13 S1.4
NetJ1_3: J1.3 S1.9 | length 659.5
  Bottom Layer w20: S1.9 -570,2310 -570,2195 J1.3
NetJ1_4: J1.4 S3.9 | length 513.9
  Top Layer w50: S3.9 -810,1657.87 -520,1947.87 -427.13,1947.87 J1.4
NetJ1_5: J1.5 S3.4 | length 594.6
  Top Layer w20: S3.4 -590,1670 -590,1745 -485,1850 J1.5
NetJ2_2: J2.2 S2.4 | length 472.5
  Top Layer w50: S2.4 -810,342.13 -617.87,150 J2.2
NetJ2_3: J2.3 S2.9 | length 659.5
  Bottom Layer w20: S2.9 -810,542.13 -605,337.13 -605,230 J2.3
NetJ2_4: J2.4 S4.9 | length 513.9
  Top Layer w50: S4.9 -810,-342.13 -520,-52.13 -427.13,-52.13 J2.4
NetJ2_5: J2.5 S4.4 | length 591.7
  Top Layer w20: S4.4 -595,-335 -595,-265 -480,-150 J2.5
NetR3_1: R3.1 S3.3 S3.10 | length 771.4
  Bottom Layer w10: S3.3 -960,1500 -960,1865 R3.1
  Bottom Layer w40: S3.10 R3.1
NetR3_2: R3.2 S1.3 S1.10 | length 811.4
  Bottom Layer w10: R3.2 -960,2115 -960,2500 S1.10
  Bottom Layer w40: R3.2 S1.3
NetR4_1: R4.1 S4.3 S4.10 | length 791.4
  Bottom Layer w10: S4.3 -910,-542.13 -960,-492.13 -960,-125 R4.1
  Bottom Layer w40: S4.10 R4.1
NetR4_2: R4.2 S2.3 S2.10 | length 814.4
  Bottom Layer w10: R4.2@-915,75 -915,80 -960,125 -960,512.13 -910,562.13 S2.10@-910,570
  Bottom Layer w40: R4.2@-915,75 R4.2 S2.3
PGND: C1.1 J3.3 J3.4 J4.3 J4.4 J5.3 | length 3539.5
  Bottom Layer w80: -5845,1840 -5843.58,1838.58 J4.3 J4.4
  Bottom Layer w100: J3.4@-5593.31,-160 -5765,-160 -5845,-80 -5845,1840 -5845,2360 J5.3 -5675,2495 -5626.54,2543.46 C1.1
PGOOD1: J4.6 U1.1 | length 2644.5
  Top Layer w10: v3(-5170,1335) -5170,1155 -4985,970 -3945,970 -3685,710 v3(-3685,705)
  Bottom Layer w10: J4.6 -5591.89,1736.89 -5588.78,1740 -5587.36,1738.58 -5398.58,1738.58 -5170,1510 v3(-5170,1335) ; U1.1 v3(-3685,705)
PGOOD2: J3.6 U1.2 | length 2288.1
  Top Layer w10: J3.6 -5531.42,-261.42 -4925,345 v3(-4475,345)
  Bottom Layer w10: v3(-4475,345) -3880,345 -3735,490 U1.2
POWERINT: J9.2 Q5.2 U1.19 | length 1811.3
  Bottom Layer w10: J9.2 -3535,-155 -3490,-200 -3490,-282 -3510.13,-302.13 -3519.53,-302.13 Q5.2
  Bottom Layer w20: U1.19 -4135,845 -4050,760 -3640,760 -3535,655 J9.2
RL_CH1: J8.1 Q1.1 Q3.1 R9.2 | length 3976.7
  Bottom Layer w20: Q3.1 -1772.01,1307.6 -1850,1385.59 -1850,1730 -1757.03,1822.97 R9.2 ; R9.2@-1757.14,2075.01 Q1.1@-1757.14,2232.49
  Bottom Layer w30: R9.2@-1757.14,2065.11 R9.2
  Bottom Layer w40: J8.1 -4295,2015 -3832.4,2477.6 -2162.6,2477.6 -1766.58,2081.58 -1763.7,2081.58 -1757.14,2075.01 R9.2@-1757.14,2065.11
RL_CH2: J8.2 Q2.1 Q4.1 R10.2 | length 5957.9
  Bottom Layer w20: Q4.1 -1772.01,-622.4 -1773.82,-620.59 -1850,-544.41 -1850,-180 -1757.03,-87.03 R10.2 -1757.14,95.11 -1757.14,105.01 -1757.14,232.49 Q2.1
  Bottom Layer w40: J8.2 -4391.17,1941.17 -4391.17,1896.17 -4350,1855 -4260,1855 -4215,1900 -4215,1985 -3800,2400 -2195,2400 -1900,2105 -1900,245 -1766.58,111.58 -1763.7,111.58 R10.2@-1757.14,105.01
SHi_CH1: J11.3 S1.8 | length 1423.9
  Top Layer w20: S1.8 -510,2550 -315,2355 -315,1633.98 J11.3
  Bottom Layer w20: S1.8@-710,2542.13 S1.8
SHi_CH2: J11.9 S2.8 | length 592.3
  Bottom Layer w20: S2.8 -262.2,550 J11.9
SLo_CH1: J11.5 S3.5 | length 652.2
  Bottom Layer w20: S3.5 -540,1450 -293.39,1203.39 J11.5
SLo_CH2: J11.11 S4.5 | length 1268.7
  Bottom Layer w20: S4.5 -515,-550 -250,-285 -250,286.61 J11.11
SS_CH1: J4.14 U2.15 | length 2125.7
  Top Layer w10: J4.14 -5268.58,1338.58 v3(-5225,1295)
  Bottom Layer w10: v3(-5225,1295) -5225,1155 -5145,1075 -4910,1075 -4660,1325 -4660,1630 -4580,1710 -4320,1710 -4185,1575 U2.15
SS_CH2: J3.14 U2.14 | length 3385.6
  Bottom Layer w10: J3.14 -5491.42,-661.42 -5225,-395 -5225,975 -5150,1050 -4900,1050 -4635,1315 -4635,1620 -4570,1685 -4345,1685 -4235,1575 U2.14
VINP: C1.2 J3.1 J3.2 J4.1 J4.2 J5.1 | length 3954.5
  Top Layer w100: J3.2@-5593.31,-60 -5745,-60 -5845,40 -5845,1825 -5731.42,1938.58 J4.1 -5691.47,1939 -5592.31,1939 J4.2
  Bottom Layer w80: J4.1 J4.2 -5586.42,1938.58 -5160,2365 -5160,2620 -5248.46,2708.46 -5341.93,2708.46 C1.2
  Bottom Layer w100: J5.1 -5595.59,2770.59 -5551.54,2726.54 C1.2
pads on no net: J1.6 J2.6 J6.1 J6.5 J6.6 J7.1 J7.2 J8.3 J8.4 J8.5 J8.6 J8.8 J8.9 J8.10 J9.3 J9.4 J9.5 J9.6 J10.5 U1.3 U1.4 U1.5 U1.6 U1.7 U1.8 U1.23 U1.24 U1.25 U1.26 U1.27 U1.28 U2.11 U2.12 U2.13

## Polygon pours and split planes (outlines as drawn)
EARTH on Bottom Layer "EARTH_L02_P000" (solid, remove dead copper, pour order 0): -5935,-780 -245,-780 -245,2765.96 -5935,2771.11 -5935,2945 165,2945 165,-955 -5935,-955
GND on Bottom Layer "GND_L02_P002" (solid, remove dead copper, pour order 2): -5905,2415 -4965,2415 -4635,2745 -1310,2745 -1310,-760 -5905,-760
no net on Top Overlay (solid): -5262.15,2485.58 cw(c-5671.19,2485.58) -5270.95,2401.16 -5592.04,2401.16 cw(c-5193.52,2484.61) -5600.68,2484.61 cw(c-5193.52,2484.61) -5599.12,2520.21 ccw(c-5556.01,2663.25) -5556.01,2513.85 ccw(c-5556.01,2663.25) -5555.97,2513.85 ccw(c-5555.18,2658.9) -5555.18,2513.85 ccw(c-5555.18,2658.9) -5431.38,2583.31 ccw(c-5307.63,2658.83) -5307.63,2513.85 ccw(c-5307.63,2658.83) -5306.82,2513.85 ccw(c-5306.72,2662.32) -5306.72,2513.85 ccw(c-5306.72,2662.32) -5263.62,2520.24 cw(c-5671.19,2485.58)
no net on Top Overlay (solid): -5313.83,2282.43 cw(c-5675.34,2485.01) -5350.83,2227.29 -5430.24,2304.51 -5509.4,2227.5 cw(c-5177.52,2489.94) -5546.41,2282.73 -5430.24,2394.34
no net on Top Overlay (none): -5271.64,2397.76 -5271.42,2398.89 -5271.19,2400.03 -5270.95,2401.16 -5271.04,2401.16 ccw(c-5671.27,2485.53) -5263.72,2520.17 cw(c-5306.81,2662.23) -5306.92,2513.78 cw(c-5307.72,2658.77) -5431.49,2583.24 cw(c-5555.28,2658.82) -5556.07,2513.78 cw(c-5556.1,2663.18) -5599.22,2520.14 ccw(c-5193.62,2484.54) -5592.14,2401.1 -5592.02,2401.1 ccw(c-5188.02,2486.32) -5547.75,2283.65 -5547.8,2283.61 ccw(c-5178.87,2490.85) -5510.78,2228.37 -5510.77,2228.38 ccw(c-5176.35,2492.98) -5431.57,2151.34 ccw(c-5687.08,2494.57) -5352.23,2228.17 -5352.22,2228.17 ccw(c-5679.52,2487.04) -5319.76,2275.58 ccw(c-5916.55,2631.17) -5310.97,2290.77 ccw(c-5627.58,2464.94) -5285.33,2349 ccw(c-5697.07,2491.25) -5272.11,2395.47
no net on Bottom Overlay (solid): -5073.93,-284.5 cw(c-5482.98,-284.5) -5082.74,-368.91 -5403.82,-368.91 cw(c-5005.31,-285.46) -5412.47,-285.46 cw(c-5005.31,-285.46) -5410.91,-249.87 ccw(c-5367.8,-106.83) -5367.8,-256.23 ccw(c-5367.8,-106.83) -5367.76,-256.23 ccw(c-5366.96,-111.18) -5366.96,-256.23 ccw(c-5366.96,-111.18) -5243.17,-186.77 ccw(c-5119.41,-111.25) -5119.41,-256.23 ccw(c-5119.41,-111.25) -5118.61,-256.23 ccw(c-5118.5,-107.75) -5118.5,-256.23 ccw(c-5118.5,-107.75) -5075.4,-249.83 cw(c-5482.98,-284.5)
no net on Bottom Overlay (solid): -5125.62,-487.64 cw(c-5487.13,-285.06) -5162.62,-542.79 -5242.02,-465.57 -5321.18,-542.58 cw(c-4989.31,-280.14) -5358.2,-487.35 -5242.02,-375.74
no net on Bottom Overlay (none): -5083.43,-372.32 -5083.2,-371.18 -5082.98,-370.05 -5082.74,-368.91 -5082.83,-368.91 ccw(c-5483.05,-284.55) -5075.5,-249.91 cw(c-5118.6,-107.85) -5118.71,-256.3 cw(c-5119.51,-111.31) -5243.27,-186.84 cw(c-5367.06,-111.26) -5367.86,-256.3 cw(c-5367.89,-106.9) -5411.01,-249.94 ccw(c-5005.41,-285.53) -5403.92,-368.98 -5403.8,-368.98 ccw(c-4999.8,-283.76) -5359.53,-486.43 -5359.58,-486.47 ccw(c-4990.65,-279.23) -5322.56,-541.71 -5322.56,-541.7 ccw(c-4988.14,-277.1) -5243.35,-618.74 ccw(c-5498.87,-275.51) -5164.01,-541.91 -5164,-541.91 ccw(c-5491.3,-283.04) -5131.54,-494.49 ccw(c-5728.34,-138.91) -5122.75,-479.31 ccw(c-5439.37,-305.14) -5097.11,-421.07 ccw(c-5508.86,-278.82) -5083.89,-374.61
GND on Top Layer "GND_L01_P001" (solid, remove dead copper, pour order 1): -5905,2745 -1310,2745 -1310,-760 -5905,-760

## Keep-outs
Keep-Out Layer:
  the board outline again, w20

## Other copper
Top Layer:
  text "10/2020" at -391.08,2620 h150

## Silkscreen, mask and mechanical layers (free items; w line width, h text height)
Top Overlay:
  drawing of 2223 lines, arcs and shapes, not listed
  text "(c) Lightwave lab RevB byWZ" at -1810,2745 h150
  text "CH1" at -3094.81,1095 h250
  text "CH2" at -3094.81,765 h250
  text "SMU" at -3441.58,-760 h500
  text "2-CH Motherboard" at -2526.15,-770 h250
Bottom Overlay:
  drawing of 150 lines, arcs and shapes, not listed
  text "(c) Lightwave lab" at -8.34,2720 h150
  text "2-CH / Motherboard" at -4077.31,2410 h150
  text "Precision SMU" at -2132.16,2395 h400
  text "CH1" at -877.15,1175 h200
  text "OUTPUT" at -385,777.4 h150 r270
  text "CH2" at -867.26,770 h200
  text "e" at -2018.94,-45 h400
  text "Arduino Mega2560" at -1922.5,-200 h150
  text "FAULT" at -3362.54,-620 h120
  text "PWR" at -3493.75,-820 h150
  text "DAC" at -3068.3,-820 h150
Top Solder:
  lines w60: -5890,-905 -5690,-905 -5490,-905 -5290,-905 ; -5815.16,2895 -5615.16,2895 -5415.16,2895 -5215.16,2895 -5207.04,2895 ; -4823.28,2895 -4815.16,2895 -4615.16,2895 -4415.16,2895 -4215.16,2895 -4015.16,2895 -3815.16,2895 -3615.16,2895 -3415.16,2895 -3215.16,2895 -3015.16,2895 -2815.16,2895 -2615.16,2895 -2415.16,2895 -2215.16,2895 -2015.16,2895 -1815.16,2895 -1615.16,2895 -1415.16,2895 -1215.16,2895 -1015.16,2895 -815.16,2895 -615.16,2895 -415.16,2895 -215.16,2895 -15.16,2895 35.71,2895 90,2840.71 90,2132.24 0,2042.24 0,1957.76 90,1867.76 90,132.24 0,42.24 0,-42.24 90,-132.24 90,-875.71 60.71,-905 -90,-905 -290,-905 -490,-905 -690,-905 -890,-905 -1090,-905 -1290,-905 -1490,-905 -1690,-905 -1890,-905 -2090,-905 -2290,-905 -2490,-905 -2690,-905 -2890,-905 -3090,-905 -3290,-905 -3490,-905 -3690,-905 -3890,-905 -4090,-905 -4290,-905 -4490,-905 -4690,-905
Bottom Solder:
  lines w60: -5890,-905 -5690,-905 -5490,-905 -5290,-905 ; -5855.71,2895 -5815.16,2895 -5615.16,2895 -5415.16,2895 -5215.16,2895 -5207.04,2895 ; -4823.28,2895 -4815.16,2895 -4615.16,2895 -4415.16,2895 -4215.16,2895 -4015.16,2895 -3815.16,2895 -3615.16,2895 -3415.16,2895 -3215.16,2895 -3015.16,2895 -2815.16,2895 -2615.16,2895 -2415.16,2895 -2215.16,2895 -2015.16,2895 -1815.16,2895 -1615.16,2895 -1415.16,2895 -1215.16,2895 -1015.16,2895 -815.16,2895 -615.16,2895 -415.16,2895 -215.16,2895 -15.16,2895 35.71,2895 90,2840.71 90,2132.24 0,2042.24 0,1957.76 90,1867.76 90,132.24 0,42.24 0,-42.24 90,-132.24 90,-875.71 60.71,-905 -90,-905 -290,-905 -490,-905 -690,-905 -890,-905 -1090,-905 -1290,-905 -1490,-905 -1690,-905 -1890,-905 -2090,-905 -2290,-905 -2490,-905 -2690,-905 -2890,-905 -3090,-905 -3290,-905 -3490,-905 -3690,-905 -3890,-905 -4090,-905 -4290,-905 -4490,-905 -4690,-905
Mechanical 1:
  lines w8: -5935,945 165,945 ; -5935,995 165,995 ; -5935,1045 165,1045 ; -5935,2945 -5935,-955 165,-955 165,2945 -5935,2945 ; -5935,2945 -5935,2945
  lines w15: -130,600 165,600
  lines w20: -5935,-55 -5935,2045 -1935,2045 -1935,-55 -5935,-55
  lines w30: -1855,2000 0,2000 ; -1840,0 0,0
Mechanical 15:
  lines w8: -5985,995 -5885,995 ; -5935,945 -5935,1045
  lines w10: -5985,-55 -5885,-55 ; -5935,-105 -5935,-5

## Text inside footprints (layer, text, board x,y; h text height)
J1: Top Overlay "*" at -504.43,2280 h80
J2: Top Overlay "*" at -504.43,280 h80
J3: Top Overlay "14" at -5611.32,-791.42 h80; Top Overlay "13" at -5730.29,-791.42 h80; Top Overlay "2" at -5584.83,28.58 h80; Top Overlay "1" at -5753.84,28.58 h80
J4: Top Overlay "14" at -5611.32,1208.58 h80; Top Overlay "2" at -5584.83,2028.58 h80; Top Overlay "1" at -5753.84,2028.58 h80; Top Overlay "13" at -5730.29,1208.58 h80
J5: Bottom Overlay "GND" at -5900,2431.05 h80 r270; Bottom Overlay "g" at -5925,2588.25 h100 r270; Bottom Overlay "VIN" at -5905,2725.39 h80 r270